# EAGLE board Headphone-Amplifier-ClassAB-10x10 (EAGLE 7.2.0)
4x4 - Three Transistor Headphone Amplifier - Class AB http://www.electronics-diy.com/4x4.php
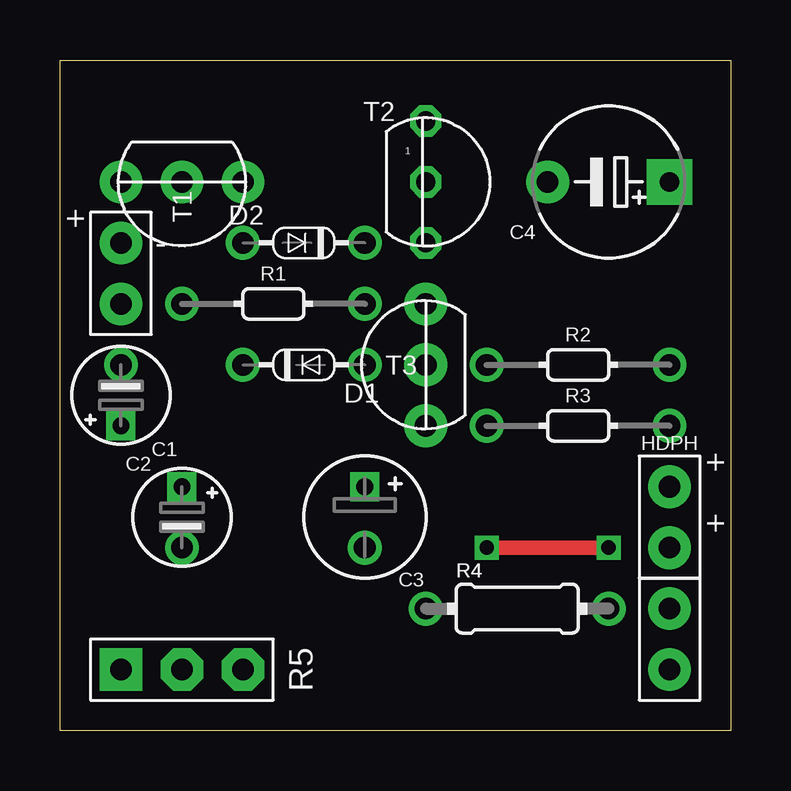
[diagram p0: board, top side]
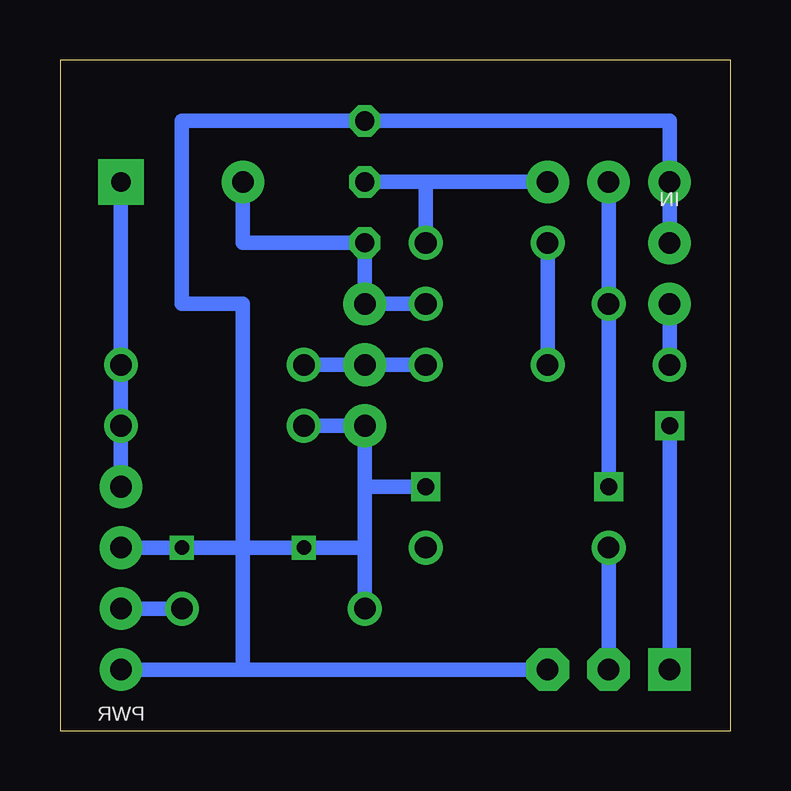
[diagram p1: board, bottom side, seen from below]

Size 27.94 x 27.94 mm. Coordinates in mm from the lower left corner, seen from the top.
Outline: 0,27.94 27.94,27.94 27.94,0 0,0 0,27.94
Copper layers (1*16): Top 0.035mm / dielectric 1.5mm / Bottom 0.035mm
Design rules "default": minimum track width 10mil, minimum drill 24mil, track to track 8mil, track to pad 8mil, pad to pad 8mil, via to via 8mil, smd to smd 8mil, copper to edge 40mil, drill to drill 8mil, minimum pad ring 10mil, minimum via ring 8mil, stop-mask expansion 4mil, vias tented up to drill 0mil, thermal gap 10mil
Net classes: 0 default: width 0.61 mm

## Footprints (pad centres in the part's own frame; a part is rotated, then mirrored left to right if it is on the bottom)
E2.5-4/V = drill 0.7 square: + 0,1.27 | drill 0.9: - 0,-1.27
E2,5-5/V = drill 0.7 square: + 0,-1.27 | drill 0.9: - 0,1.27
E5-6 = drill 0.8 pad 1.905 square: + -2.54,0 | drill 0.9 pad 1.778: - 2.54,0
DO34-5 = drill 0.9: A 2.54,0; C -2.54,0
SPAD-+ = drill 0.9 pad 1.778: 1 0,-1.27; 2 0,1.27
SPAD+- = drill 0.9 pad 1.778: 1 0,-1.27; 2 0,1.27
0202/7 = drill 0.9: 1 -3.81,0; 2 3.81,0
0204/7 = drill 0.9: 1 -3.81,0; 2 3.81,0
CONN-3P = drill 0.9 pad 1.778 square: 1 0,-2.54 | drill 0.9 pad 1.778 octagon: 2 0,0; 3 0,2.54
TO92-CBE = drill 0.9 pad 1.778: B 0,0; C 0,2.54; E 0,-2.54
TO92 = drill 0.8 octagon: 1 0,2.54; 2 0,0; 3 0,-2.54

## Placement (x,y rotation side)
C1  4.7μF  [E2.5-4/V]  2.54,13.97 180 top
C2  4.7μF  [E2.5-4/V]  5.08,8.89 0 top
C3  100-1000μF  [E2,5-5/V]  12.7,8.89 180 top
C4  220μF  [E5-6]  22.86,22.86 180 top
D1  1N4148  [DO34-5]  10.16,15.24 0 top
D2  1N4148  [DO34-5]  10.16,20.32 180 top
HDPH  [SPAD-+]  25.4,8.89 180 top
IN  [SPAD+-]  2.54,19.05 180 top
PWR  [SPAD+-]  25.4,3.81 0 top
R1  100kΩ  [0202/7]  8.89,17.78 0 top
R2  330Ω  [0202/7]  21.59,15.24 0 top
R3  100Ω  [0202/7]  21.59,12.7 0 top
R4  22Ω  [0204/7]  19.05,5.08 0 top
R5  100kΩ  [CONN-3P]  5.08,2.54 270 top
T1  BC547  [TO92-CBE]  5.08,22.86 270 top
T2  BC327  [TO92]  15.24,22.86 0 top
T3  BC337  [TO92-CBE]  15.24,15.24 180 top

## Library data of the parts
C1-C4 = c
D1 D2 = d
HDPH IN PWR = pad
R1-R5 = r
T1-T3 = t

## Nets
GND: IN.1 PWR.1 R5.3 T1.E T2.1
N$1: D1.A R2.1 T3.B
N$2: D2.C T1.C T2.2
N$3: D1.C D2.A
N$4: C4.- R1.2 T2.3 T3.E
N$5: C1.- IN.2
N$6: C2.- R5.2
N$7: C2.+ R1.1 T1.B
N$8: C3.+ HDPH.2 R3.1 R4.1 T3.C
N$9: C4.+ HDPH.1 R2.2 R3.2
N$10: C1.+ R5.1
V+: PWR.2 R4.2

## Tracks (layer width: path | path; a pad name or v marks a point on that pad's centre or on a via)
GND
  Bottom 0.61: 20.32,2.54 20.32,17.78 22.86,17.78 22.86,25.4 T2.1 2.54,25.4 T1.E IN.1 | PWR.1 20.32,2.54 | R5.3 20.32,2.54
N$1
  Bottom 0.61: D1.A T3.B R2.1
N$2
  Bottom 0.61: 12.7,22.86 T2.2 | T1.C 12.7,22.86 | 12.7,22.86 D2.C
N$3
  Bottom 0.61: D1.C D2.A
N$4
  Bottom 0.61: C4.- 20.32,20.32 T2.3 T3.E R1.2
N$5
  Bottom 0.61: IN.2 C1.-
N$6
  Bottom 0.61: R5.2 C2.-
N$7
  Bottom 0.61: C2.+ R1.1 T1.B
N$8  (via drill 0.6)
  Top 0.61: v22.86,7.62 v17.78,7.62
  Bottom 0.61: R4.1 15.24,7.62 | C3.+ 15.24,10.16 | 15.24,7.62 v17.78,7.62 v22.86,7.62 HDPH.2 | 15.24,7.62 15.24,10.16 | 15.24,10.16 T3.C R3.1
N$9
  Bottom 0.61: C4.+ R2.2 R3.2 HDPH.1
N$10
  Bottom 0.61: R5.1 C1.+
V+
  Bottom 0.61: R4.2 PWR.2

## Text on the board
Measures: 1 | 2 | 3 | 4 | 5 | 6 | 7 | 8 | 9 | 10 | 10 | 9 | 8 | 7 | 6 | 5 | 4 | 3 | 2 | 1